# EAGLE board Robot (EAGLE 9.1.3)
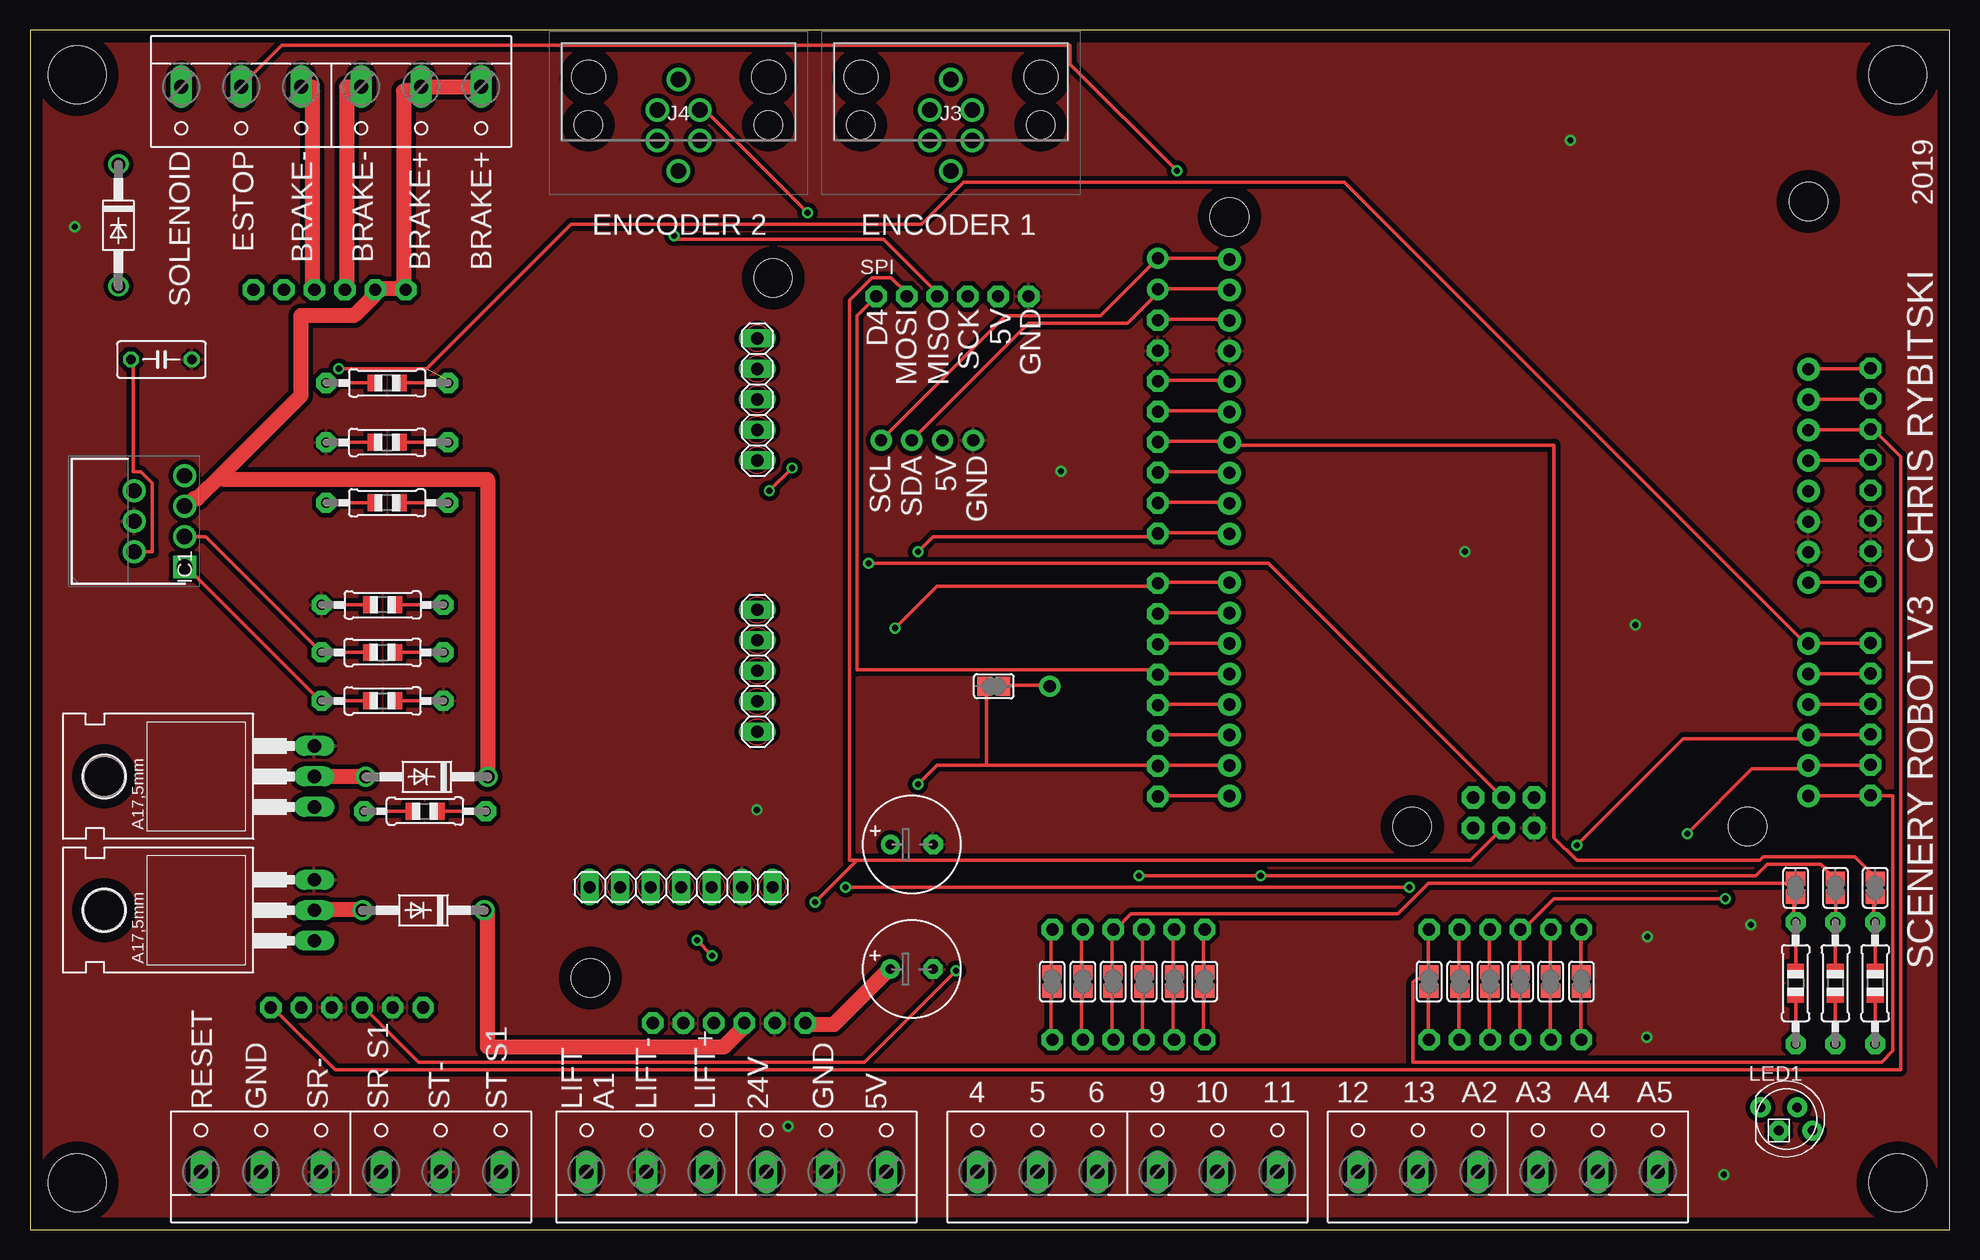
[diagram p0: board, top side]
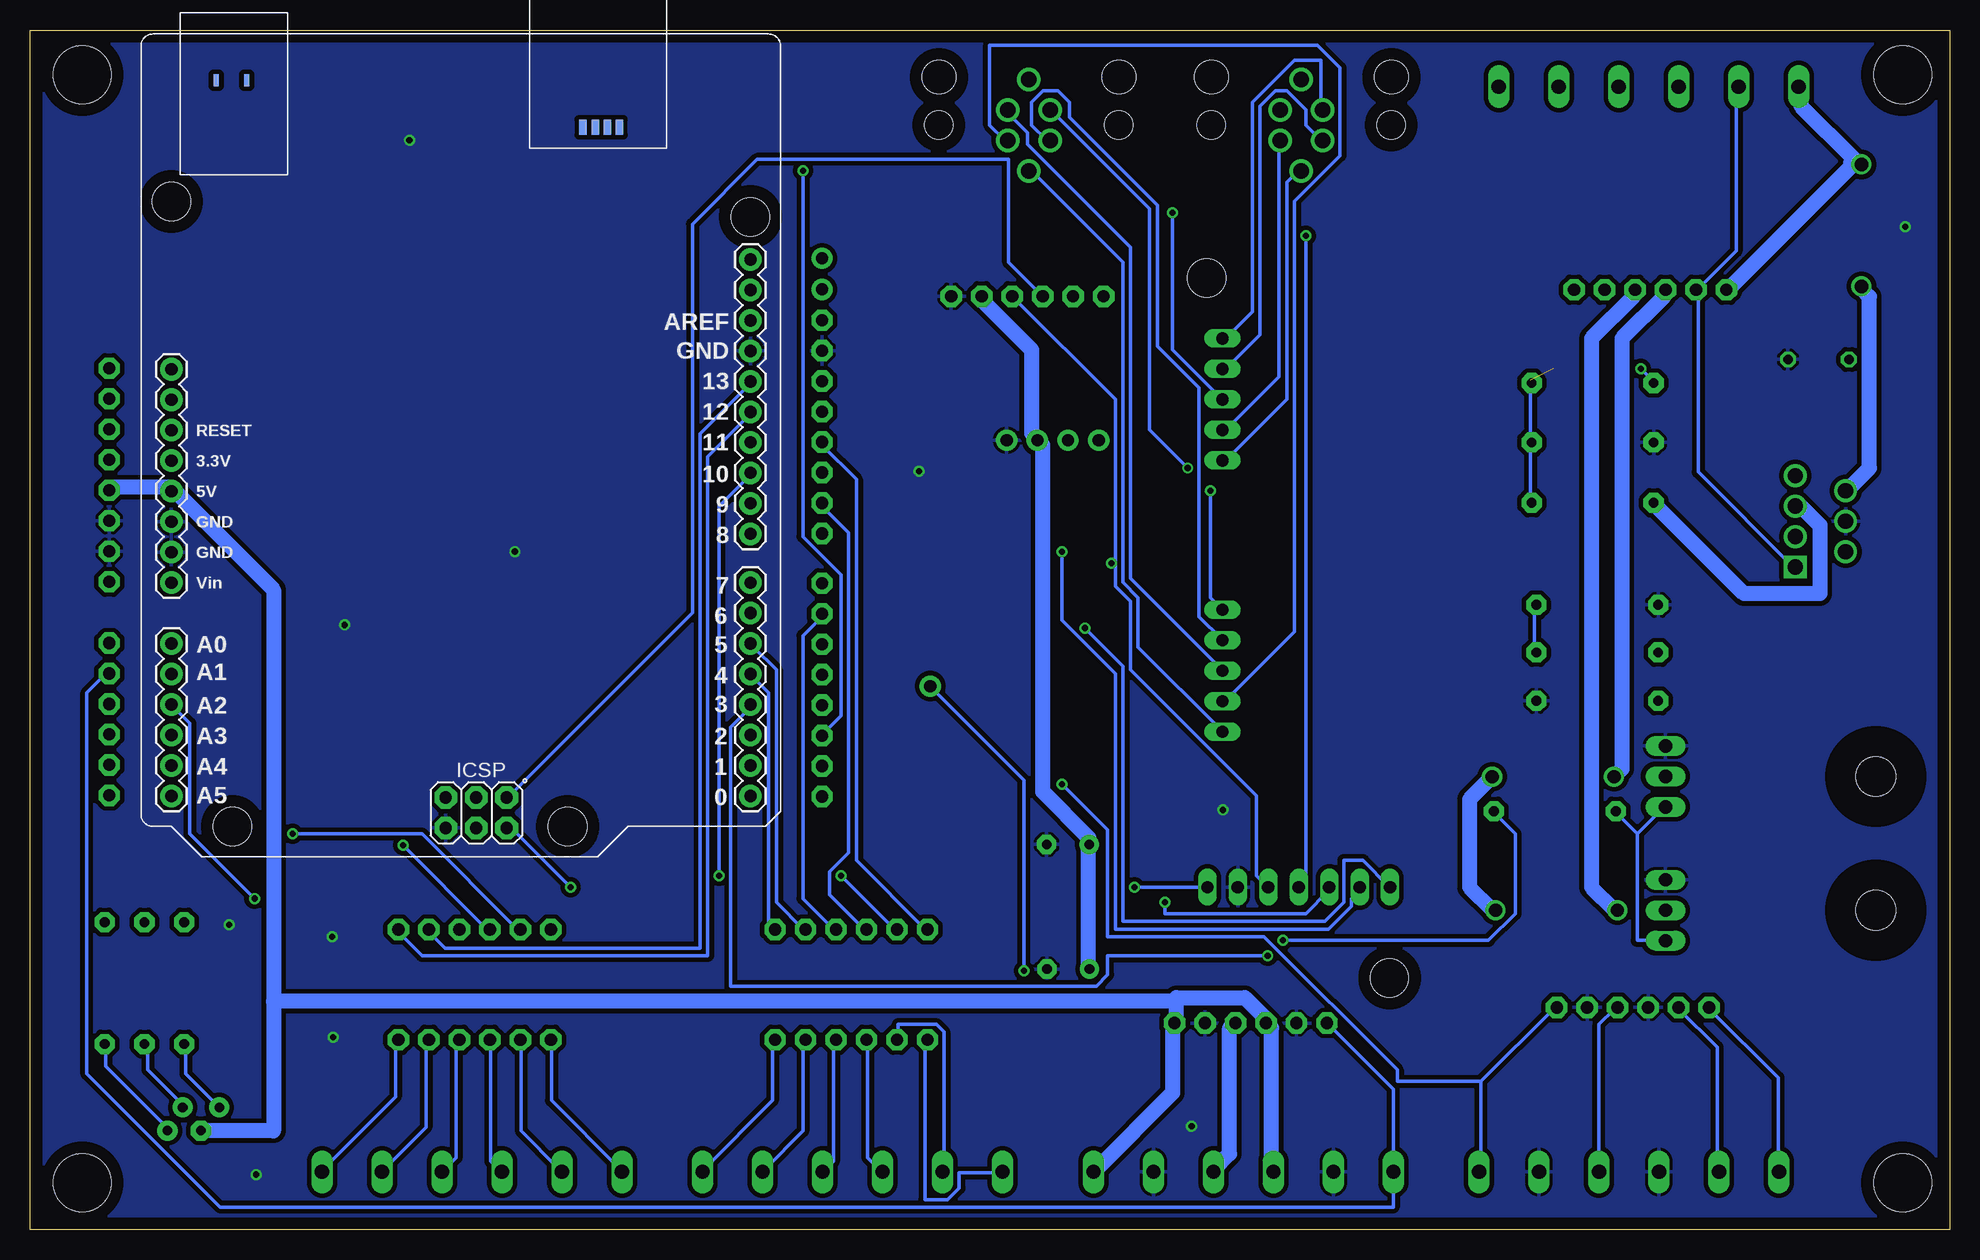
[diagram p1: board, bottom side, seen from below]

Size 160.03 x 99.97 mm. Coordinates in mm from the lower left corner, seen from the top.
Outline: 0,0 160,0 160.03,99.97 0.03,99.97 0,0
Copper layers (1*16): Top 0.035mm / dielectric 1.5mm / Bottom 0.035mm
Design rules "default": minimum track width 6mil, minimum drill 0.35mm, track to track 6mil, track to pad 6mil, pad to pad 6mil, via to via 6mil, smd to smd 6mil, copper to edge 40mil, drill to drill 6mil, minimum pad ring 10mil, minimum via ring 8mil, stop-mask expansion 4mil, vias tented up to drill 0mil, thermal gap 10mil
Net classes: 0 default: width 0.305 mm, drill 0.508 mm, clearance 0.254 mm; 1 Power: width 1.27 mm, drill 0.508 mm, clearance 0.381 mm
Holes 3.17 mm at 46.72,20.96 61.94,79.31
Holes 4.83 mm at 155.68,96.24 155.68,3.91 3.94,96.24 3.94,3.91

## Footprints (pad centres in the part's own frame; a part is rotated, then mirrored left to right if it is on the bottom)
E3,5-8 = drill 0.813 pad 1.6: + -1.778,0 | drill 0.813 pad 1.6 octagon: - 1.778,0
C050-030X075 = drill 0.813 octagon: 1 -2.54,0; 2 2.54,0
DO41-10 = drill 1.118: A 5.08,0; C -5.08,0
TO127P470X1016X2195-7P = drill 1.27 pad 1.905 square: 1 0,0 | drill 1.27 pad 1.905: 2 1.27,4.19; 3 2.54,0; 4 3.81,4.19; 5 5.08,0; 6 6.35,4.19; 7 7.62,0
421720812 = drill 1.3 pad 1.95: 1 -1.77,1.27; 2 -1.77,-1.27; 3 0,-3.81; 4 1.77,-1.27; 5 1.77,1.27; 6 0,3.81 | hole 2.35: -7.5,0; 7.5,0 | hole 2.8: -7.5,-4; 7.5,-4
1X05 = drill 1.016 long: 1 -5.08,0; 2 -2.54,0; 3 0,0; 4 2.54,0; 5 5.08,0
1X07 = drill 1.016 long: 1 -7.62,0; 2 -5.08,0; 3 -2.54,0; 4 0,0; 5 2.54,0; 6 5.08,0; 7 7.62,0
1X06-CLEANBIG = drill 1.016 pad 1.778 octagon: 1 -6.35,0; 2 -3.81,0; 3 -1.27,0; 4 1.27,0; 5 3.81,0; 6 6.35,0
1X08-CLEANBIG = drill 1.016 pad 1.778 octagon: 1 -8.89,0; 2 -6.35,0; 3 -3.81,0; 4 -1.27,0; 5 1.27,0; 6 3.81,0; 7 6.35,0; 8 8.89,0
1X01-CLEANBIG = drill 1.016 pad 1.778: 1 0,0
LED5MMRGB = drill 0.8 pad 1.676: 1 -2.159,0.968; 3 0.889,0.968; 4 2.159,-0.968 | drill 0.8 pad 1.676 octagon: 2 -0.635,-0.968
ARDUINO_UNO = drill 1.016 pad 1.88: 0 63.5,50.8; 1 60.96,50.8; 2 58.42,50.8; 3 55.88,50.8; 3.3V 35.56,2.54; 4 53.34,50.8; 5 50.8,50.8; 5V 38.1,2.54; 6 48.26,50.8; 7 45.72,50.8; 8 41.656,50.8; 9 39.116,50.8; 10 36.576,50.8; 11 34.036,50.8; 12 31.496,50.8; 13 28.956,50.8; A0 50.8,2.54; A1 53.34,2.54; A2 55.88,2.54; A3 58.42,2.54; A4 60.96,2.54; A5 63.5,2.54; AREF 23.876,50.8; GND 26.416,50.8; GND. 43.18,2.54; GND.. 40.64,2.54; I/OREF 30.48,2.54; N/C 27.94,2.54; RESET 33.02,2.54; SCL 18.796,50.8; SDA 21.336,50.8; VIN 45.72,2.54 | drill 1.016 pad 1.88 octagon: +5V 66.167,30.48; GND_ 66.167,25.4; MISO 63.627,30.48; MOSI 66.167,27.94; RESET. 63.627,25.4; SCK 63.627,27.94 | smd 1.016 x 0.508: <PWR>+V 3.861,8.814; <PWR>-V 3.861,6.274 | smd 1.27 x 0.635: <USB>+V 7.772,39.878; <USB>D+ 7.772,38.887; <USB>D- 7.772,37.871; <USB>GND 7.772,36.83 | hole 3.2: 66.04,7.62; 66.04,35.56; 15.24,50.8; 13.97,2.54
TO220AH = drill 1.118 long: B -2.54,-6.35; C 0,-6.35; E 2.54,-6.35 | hole 3.302: 0,11.176
0805-THM = drill 0.813 pad 1.676 octagon: 1 -5.08,0; 2 5.08,0
SJ = smd 1.168 x 1.6: 1 -0.762,0; 2 0.762,0
W237-6 = drill 1.194 long: 1 -12.5,-1.27; 2 -7.5,-1.27; 3 -2.5,-1.27; 4 2.5,-1.27; 5 7.5,-1.27; 6 12.5,-1.27

## Placement (x,y rotation side)
C5  [E3,5-8]  73.49,21.71 0 top
C6  0.1uF  [C050-030X075]  10.95,72.51 0 top
C7  [E3,5-8]  73.51,32.1 0 top
D1  1N4004  [DO41-10]  7.37,83.69 270 top
D2  1N4004  [DO41-10]  32.8,26.62 180 top
D3  1N4004  [DO41-10]  33.08,37.74 180 top
IC1  DRV102T  [TO127P470X1016X2195-7P]  12.88,55.22 90 top
J3  4-2172081-2  [421720812]  76.76,92.05 180 top
J4  4-2172081-2  [421720812]  54.06,92.05 180 top
JP1  [1X05]  60.63,46.58 90 top
JP2  [1X05]  60.63,69.18 90 top
JP3  [1X07]  54.28,28.54 0 top
JP4  [1X06-CLEANBIG]  24.97,78.33 0 top
JP5  [1X08-CLEANBIG]  94.01,44.98 270 top
JP6  [1X08-CLEANBIG]  153.42,62.89 90 top
JP7  [1X06-CLEANBIG]  58.27,17.22 180 top
JP8  [1X08-CLEANBIG]  94.01,66.9 270 top
JP9  [1X01-CLEANBIG]  94.01,78.35 0 top
JP10  [1X01-CLEANBIG]  94.01,80.95 0 top
JP11  [1X06-CLEANBIG]  153.42,42.54 90 top
JP12  [1X01-CLEANBIG]  84.99,45.28 0 top
JP13  [1X06-CLEANBIG]  26.42,18.51 180 top
JP14  [1X06-CLEANBIG]  91.57,15.82 180 top
JP15  [1X06-CLEANBIG]  122.97,15.82 180 top
JP16  [1X06-CLEANBIG]  91.57,25.01 0 top
JP17  [1X06-CLEANBIG]  122.97,25.01 0 top
JP18  [1X01-CLEANBIG]  70.95,65.78 0 top
JP19  [1X01-CLEANBIG]  73.5,65.78 0 top
JP20  [1X01-CLEANBIG]  76.06,65.78 0 top
JP21  [1X01-CLEANBIG]  78.62,65.78 0 top
LED1  RGBLED_CA-5MM  [LED5MMRGB]  146.41,9.22 0 top
PCB1  ARDUINO_UNO  [ARDUINO_UNO]  150.78,99.64 270 bottom
Q3  TIP120  [TO220AH]  17.35,37.77 90 top
Q4  TIP120  [TO220AH]  17.35,26.62 90 top
R5  [0805-THM]  153.8,20.54 270 top
R6  [0805-THM]  150.49,20.54 270 top
R7  [0805-THM]  147.17,20.54 270 top
R9  10K  [0805-THM]  29.77,70.56 180 top
R10  10K  [0805-THM]  29.77,60.57 180 top
R11  2.2K  [0805-THM]  29.77,65.6 0 top
R12  20K  [0805-THM]  29.39,48.1 0 top
R13  51K  [0805-THM]  29.39,52.07 180 top
R14  10K  [0805-THM]  29.39,44.06 0 top
R15  10K  [0805-THM]  32.92,34.87 0 top
SJ1  [SJ]  80.34,45.28 0 top
SJ2  [SJ]  97.92,20.67 270 top
SJ4  [SJ]  153.8,28.49 270 top
SJ5  [SJ]  150.49,28.49 270 top
SJ6  [SJ]  147.17,28.49 270 top
SJ7  [SJ]  95.41,20.67 270 top
SJ8  [SJ]  92.87,20.67 270 top
SJ9  [SJ]  90.28,20.67 270 top
SJ10  [SJ]  87.76,20.67 270 top
SJ11  [SJ]  85.2,20.67 270 top
SJ12  [SJ]  129.32,20.67 270 top
SJ13  [SJ]  126.75,20.67 270 top
SJ14  [SJ]  124.24,20.67 270 top
SJ15  [SJ]  121.7,20.67 270 top
SJ16  [SJ]  119.18,20.67 270 top
SJ17  [SJ]  116.62,20.67 270 top
SPI  [1X06-CLEANBIG]  76.89,77.77 0 top
X1  [W237-6]  25.1,93.98 180 top
X2  [W237-6]  26.75,6.09 0 top
X3  [W237-6]  58.88,6.09 0 top
X4  [W237-6]  91.47,6.09 0 top
X5  [W237-6]  123.19,6.09 0 top

## Library data of the parts
C5-C7 = rcl; SPICEPREFIX: C
D1-D3 = diode
IC1 = SamacSys_Parts; DESCRIPTION: PWM solenoid driver,DRV102T TO220-7 2.7A; HEIGHT: 4.7mm; MANUFACTURER_NAME: Texas Instruments; MANUFACTURER_PART_NUMBER: DRV102T; MOUSER_PART_NUMBER: 595-DRV102T; MOUSER_PRICE-STOCK: https://www.mouser.com/Search/Refine.aspx?Keyword=595-DRV102T; RS_PART_NUMBER: 1218532; RS_PRICE-STOCK: http://uk.rs-online.com/web/p/products/1218532
J3 J4 = 4-2172081-2; DESCRIPTION: TE Connectivity M12 Series, 5 Pole PCB Mount Circular Connector Plug, with Male Contacts, IP68; HEIGHT: 15mm; MANUFACTURER_NAME: TE Connectivity; MANUFACTURER_PART_NUMBER: 4-2172081-2; MOUSER_PART_NUMBER: 571-4-2172081-2; MOUSER_PRICE-STOCK: https://www.mouser.com/Search/Refine.aspx?Keyword=571-4-2172081-2; RS_PART_NUMBER: 9144538; RS_PRICE-STOCK: http://uk.rs-online.com/web/p/products/9144538
JP1-JP3 = pinhead
JP4-JP21 LED1 R5-R7 R9-R15 SPI = adafruit
PCB1 = E14_Arduino_revC
Q3 Q4 = transistor-power
SJ1 SJ2 SJ4-SJ17 = jumper
X1-X5 = con-wago-500; OC_FARNELL: unknown; OC_NEWARK: unknown

## Nets
3.3V: JP6.5 PCB1.3.3V
+5V [Power]: C5.+ C7.+ JP6.4 JP7.1 JP7.4 JP20.1 LED1.2 PCB1.5V SPI.5 X3.3 X3.6
+24V [Power]: D2.C D3.C IC1.5 JP4.5 JP4.6 JP7.3 R10.2 X1.1 X1.2 X3.4
A0: JP11.6 PCB1.A0 R9.1 R9.2 R10.1 R11.2
A1: JP7.6 JP11.5 PCB1.A1 X3.1
A2: JP11.4 JP17.4 PCB1.A2 SJ14.1
A3: JP11.3 JP17.3 PCB1.A3 SJ15.1
A4: JP11.2 JP17.2 PCB1.A4 SJ16.1
A5: JP11.1 JP17.1 PCB1.A5 SJ17.1
AREF: JP8.1 PCB1.AREF
ATN: JP6.8 PCB1.N/C
BRAKE1 [Power]: D3.A JP4.3 Q3.C X1.4
BRAKE2 [Power]: D2.A JP4.4 Q4.C X1.3
D0: JP5.8 PCB1.0
D1: JP5.7 JP13.1 PCB1.1 SJ1.1 X2.6
D3: JP5.5 PCB1.3 R15.2
D4: JP5.4 JP16.6 PCB1.4 SJ2.1 SPI.1
D5: JP5.3 JP16.5 PCB1.5 SJ7.1
D6: JP5.2 JP16.4 PCB1.6 SJ8.1
D7: JP3.1 JP5.1 PCB1.7
D8: JP3.2 JP8.8 PCB1.8
D9: JP8.7 JP16.3 PCB1.9 SJ6.1 SJ9.1
D10: JP8.6 JP16.2 PCB1.10 SJ5.1 SJ10.1
D11: JP8.5 JP16.1 PCB1.11 SJ4.1 SJ11.1
D12: JP8.4 JP17.6 PCB1.12 SJ12.1
D13: JP8.3 JP17.5 PCB1.13 SJ13.1
ESTOP-IN: IC1.1 JP4.2 JP5.6 PCB1.2 R14.1 X1.5
GND [Power]: C5.- C6.2 C7.- IC1.4 JP3.6 JP6.2 JP6.3 JP7.2 JP7.5 JP8.2 JP13.2 JP13.4 JP21.1 PCB1.GND PCB1.GND. PCB1.GND.. PCB1.GND_ Q3.E Q4.E R11.1 R13.2 R14.2 SPI.6 X2.3 X2.5 X3.2 X3.5
I/OREF: JP6.7 PCB1.I/OREF
MISO: JP3.4 PCB1.MISO SPI.3
MOSI: JP3.3 PCB1.MOSI SPI.2
N$2: LED1.1 R7.2
N$3: LED1.3 R6.2
N$4: LED1.4 R5.2
N$5: J3.1 JP1.2
N$6: J3.2 JP1.3
N$7: J3.5 JP1.4
N$8: J3.4 JP1.5
N$9: J4.1 JP2.2
N$10: J4.2 JP2.3
N$11: J4.4 JP2.5
N$12: J4.5 JP2.4
N$13: C6.1 IC1.2
N$14: R12.2 R13.1
N$15: IC1.3 R12.1
N$16 [Power]: D1.A IC1.6
N$17: Q3.B Q4.B R15.1
N$18: JP14.1 SJ2.2 X4.6
N$19: JP14.2 SJ7.2 X4.5
N$20: JP14.3 SJ8.2 X4.4
N$21: J3.6 JP1.1
N$22: JP12.1 JP13.3 SJ1.2 X2.4
N$23: J4.6 JP2.1
N$24: JP14.4 SJ9.2 X4.3
N$25: JP14.5 SJ10.2 X4.2
N$26: JP14.6 SJ11.2 X4.1
N$27: JP15.1 SJ12.2 X5.6
N$28: JP15.2 SJ13.2 X5.5
N$29: JP15.3 SJ14.2 X5.4
N$30: JP15.4 SJ15.2 X5.3
N$31: JP15.5 SJ16.2 X5.2
N$32: JP15.6 SJ17.2 X5.1
N$33: JP13.5 X2.2
N$34: R7.1 SJ6.2
N$35: R6.1 SJ5.2
N$36: R5.1 SJ4.2
RESET: JP6.6 JP13.6 PCB1.RESET X2.1
SCK: JP3.5 PCB1.SCK SPI.4
SCL: JP10.1 JP18.1 PCB1.SCL
SDA: JP9.1 JP19.1 PCB1.SDA
SOLENOID [Power]: D1.C JP4.1 X1.6
SPIV+: JP3.7 PCB1.+5V
VIN: JP6.1 PCB1.VIN

## Tracks (layer width: path | path; a pad name or v marks a point on that pad's centre or on a via)
3.3V
  Top 0.305: JP6.5 153.38,64.11 148.3,64.11 PCB1.3.3V
+5V
  Top 1.27: C5.+ 71.47,21.56 67.02,17.12 64.8,17.12 JP7.1
  Bottom 1.27: 139.73,19.02 139.73,53.31 147.98,61.57 PCB1.5V 148.62,61.88 153.38,61.88 JP6.4 | 139.73,19.02 139.73,8.23 145.76,8.23 LED1.2 | SPI.5 80.67,77.76 80.67,77.44 76.55,73.31 76.55,66.33 76.23,66.01 JP20.1 75.59,65.38 75.59,36.48 71.78,32.67 C7.+ 71.78,32.04 71.78,21.88 C5.+ | X3.3 56.54,5.05 56.54,16.8 56.86,17.12 JP7.4 57.18,17.75 58.77,19.34 64.48,19.34 | X3.6 71.15,5.05 64.8,11.4 64.8,17.12 JP7.1 64.48,17.75 64.48,19.34 | 139.73,19.02 139.41,19.02 64.8,19.02 64.48,19.34
+24V
  Top 1.27: D2.C 38.13,26.32 38.13,15.21 57.81,15.21 59.72,17.12 JP7.3 | X1.1 37.49,95.22 32.73,95.22 X1.2 32.1,94.9 31.14,94.9 31.14,79.03 JP4.6 31.14,78.39 28.92,78.39 JP4.5 28.6,77.76 27.02,76.17 22.57,76.17 22.57,69.5 15.9,62.84 | 15.9,62.84 14,60.93 13.68,60.93 13.05,60.3 IC1.5 | D3.C 38.13,37.75 38.13,62.52 16.22,62.52 15.9,62.84
  Bottom 1.27: D2.C 38.13,26.64 40.03,28.55 40.03,35.85 38.45,37.44 D3.C | JP7.3 59.72,17.12 60.04,16.8 60.04,6.32 61.31,5.05 X3.4 | R10.2 24.48,60.3 17.17,52.99 10.82,52.99 10.82,58.71 12.41,60.3 12.73,60.3 IC1.5
A0  (via drill 0.51)  (1 unrouted)
  Top 0.305: JP11.6 153.38,48.87 148.3,48.87 PCB1.A0 147.98,48.87 109.57,87.28 77.82,87.28 74.32,83.79 45.11,83.79 33.05,71.73 v25.75,71.73 | 34.95,70.77 R9.1
  Bottom 0.305: R10.1 34.95,60.61 34.95,65.38 R11.2 34.95,65.69 34.95,70.46 R9.1 | v25.75,71.73 24.79,70.77 R9.2
A1
  Top 0.305: JP11.5 153.38,46.33 148.3,46.33 PCB1.A1
  Bottom 0.305: JP7.6 51.78,17.12 46.38,11.72 46.38,5.05 X3.1 46.38,4.73 46.38,1.88 144.17,1.88 155.29,12.99 155.29,44.74 153.7,46.33 JP11.5
A2  (via drill 0.51)
  Top 0.305: SJ14.1 124.17,21.56 124.17,24.74 JP17.4 124.49,25.05 127.03,27.59 v141.32,27.59 | JP11.4 153.38,43.79 148.3,43.79 PCB1.A2
  Bottom 0.305: v141.32,27.59 146.71,32.99 146.71,42.2 147.98,43.47 PCB1.A2
A3  (via drill 0.51)
  Top 0.305: SJ15.1 121.63,21.56 121.63,24.74 JP17.3 | JP11.3 153.38,41.25 148.3,41.25 PCB1.A3 147.98,40.93 137.82,40.93 v128.93,32.04
  Bottom 0.305: v128.93,32.04 121.95,25.05 JP17.3
A4  (via drill 0.51)
  Top 0.305: SJ16.1 119.09,21.56 119.09,24.74 JP17.2 | JP11.2 153.38,38.71 148.3,38.71 PCB1.A4 147.98,38.39 143.54,38.39 v138.14,32.99
  Bottom 0.305: v138.14,32.99 127.35,32.99 119.41,25.05 JP17.2
A5
  Top 0.305: JP17.1 116.55,24.74 116.55,21.56 SJ17.1 116.55,21.24 116.23,20.93 115.6,20.93 115.28,20.61 115.28,13.94 154.33,13.94 155.29,14.89 155.29,36.17 153.7,36.17 JP11.1 153.38,36.17 148.3,36.17 PCB1.A5
AREF
  Top 0.305: JP8.1 94.01,75.85 99.72,75.85 PCB1.AREF
ATN
  Top 0.305: JP6.8 153.38,71.73 148.3,71.73 PCB1.N/C
BRAKE1
  Top 1.27: Q3.C 23.84,37.75 27.97,37.75 D3.A | JP4.3 23.52,78.39 23.52,95.22 22.89,95.22 X1.4
  Bottom 1.27: D3.A 27.97,37.75 27.33,38.39 27.33,74.27 23.84,77.76 23.84,78.08 JP4.3
BRAKE2
  Top 1.27: Q4.C 23.84,26.64 27.65,26.64 D2.A | JP4.4 26.38,78.39 26.38,95.22 27.33,95.22 X1.3
  Bottom 1.27: D2.A 27.97,26.64 29.87,28.55 29.87,74.27 26.38,77.76 26.38,78.08 JP4.4
D0
  Top 0.305: JP5.8 94.01,36.17 99.72,36.17 PCB1.0
D1  (via drill 0.51)
  Top 0.305: 79.72,38.71 79.72,45.06 SJ1.1 | 94.01,38.71 79.72,38.71 | 94.01,38.71 JP5.7 94.01,38.71 | 94.01,38.71 99.72,38.71 PCB1.1 | v74.01,37.12 75.59,38.71 79.72,38.71
  Bottom 0.305: 39.08,12.35 33.05,18.39 JP13.1 | 39.08,12.35 39.08,5.05 X2.6 | 39.08,12.35 46.07,12.35 46.07,13.31 57.18,24.42 70.2,24.42 70.2,33.31 v74.01,37.12
D3  (via drill 0.51)
  Top 0.305: v56.86,22.83 v55.59,24.1 | JP5.5 94.01,43.79 99.72,43.79 PCB1.3
  Bottom 0.305: v55.59,24.1 38.45,24.1 36.22,26.32 36.22,32.99 37.81,34.58 R15.2 | v56.86,22.83 70.2,22.83 70.2,21.24 71.15,20.29 101.63,20.29 101.63,41.88 100.04,43.47 PCB1.3
D4
  Top 0.305: SJ2.1 97.82,21.56 97.82,24.74 JP16.6 | 94.01,46.33 93.69,46.64 68.93,46.64 68.93,76.17 70.51,77.76 SPI.1 | 94.01,46.33 JP5.4 94.01,46.33 | 94.01,46.33 99.72,46.33 PCB1.4
  Bottom 0.305: JP16.6 98.14,25.05 98.45,25.37 98.45,44.74 99.72,46.01 PCB1.4
D5
  Top 0.305: SJ7.1 95.28,21.56 95.28,24.74 JP16.5 | JP5.3 94.01,48.87 99.72,48.87 PCB1.5
  Bottom 0.305: JP16.5 95.6,25.05 97.82,27.28 97.82,46.64 99.72,48.55 PCB1.5
D6
  Top 0.305: SJ8.1 92.74,21.56 92.74,24.74 JP16.4 | JP5.2 94.01,51.41 99.72,51.41 PCB1.6
  Bottom 0.305: JP16.4 93.06,25.05 95.6,27.59 95.6,49.5 94.01,51.09 JP5.2
D7  (via drill 0.51)
  Top 0.305: v72.1,50.14 75.59,53.63 94.01,53.63 JP5.1 94.01,53.95 99.72,53.95 PCB1.7
  Bottom 0.305: v72.1,50.14 68.93,46.96 68.93,25.69 52.1,25.69 50.51,27.28 50.51,30.77 48.92,30.77 46.7,28.55 JP3.1
D8  (via drill 0.51)
  Top 0.305: v74.01,56.49 75.28,57.76 94.01,57.76 JP8.8 94.01,58.07 99.72,58.07 PCB1.8
  Bottom 0.305: v74.01,56.49 74.01,50.77 69.56,46.33 69.56,25.05 51.78,25.05 49.88,26.96 49.88,27.59 49.24,28.23 JP3.2
D9
  Top 0.305: JP8.7 94.01,60.61 99.72,60.61 PCB1.9 | SJ9.1 90.2,21.56 90.2,24.74 JP16.3 90.52,25.05 91.79,26.32 114.01,26.32 116.55,28.86 146.71,28.86 147.03,29.18 SJ6.1
  Bottom 0.305: JP8.7 94.01,60.3 91.79,58.07 91.79,31.4 93.37,29.82 93.37,27.91 90.52,25.05 JP16.3
D10  (via drill 0.51)
  Top 0.305: JP8.6 94.01,63.15 99.72,63.15 PCB1.10 | SJ10.1 87.66,21.56 87.66,24.74 JP16.2 | v92.42,29.5 v102.58,29.5 143.86,29.5 144.81,30.45 149.25,30.45 150.21,29.5 SJ5.1
  Bottom 0.305: v92.42,29.5 87.98,25.05 JP16.2 | v102.58,29.5 102.58,60.3 100.04,62.84 PCB1.10
D11
  Top 0.305: SJ11.1 85.12,21.56 85.12,24.74 JP16.1 | SJ4.1 153.7,29.5 152.11,31.09 144.49,31.09 144.17,30.77 128.93,30.77 127.03,32.67 127.03,65.38 100.04,65.38 PCB1.11 99.72,65.69 94.01,65.69 JP8.5
  Bottom 0.305: JP16.1 85.44,25.05 91.15,30.77 91.15,62.52 94.01,65.38 JP8.5
D12
  Top 0.305: SJ12.1 129.25,21.56 129.25,24.74 JP17.6 | JP8.4 94.01,68.23 99.72,68.23 PCB1.12
  Bottom 0.305: JP17.6 129.25,24.74 127.35,22.83 103.53,22.83 103.53,64.42 100.04,67.92 PCB1.12
D13
  Top 0.305: SJ13.1 126.71,21.56 126.71,24.74 JP17.5 | JP8.3 94.01,70.77 99.72,70.77 PCB1.13
  Bottom 0.305: JP17.5 126.71,24.74 125.44,23.47 104.17,23.47 104.17,66.33 100.04,70.46 PCB1.13
ESTOP-IN  (via drill 0.51)
  Top 0.305: R14.1 24.16,44.1 13.05,55.22 IC1.1 | JP5.6 94.01,41.25 99.72,41.25 PCB1.2 | v95.6,88.24 86.71,97.13 86.71,98.71 20.98,98.71 17.81,95.54 X1.5
  Bottom 0.305: X1.5 17.81,95.22 17.81,81.57 20.98,78.39 JP4.2 20.98,78.08 20.98,63.15 13.05,55.22 IC1.1 | v95.6,88.24 95.6,57.76 92.42,54.58 92.42,42.83 94.01,41.25 JP5.6
GND  (via drill 0.51)
  other vias: 60.58,34.97 63.2,8.61 85.93,63.19 128.4,90.78 119.61,56.51 133.81,50.39 134.83,24.41 143.44,25.42 134.75,16.05 141.18,4.59 3.71,83.56
  pour Top: -2.03,101.85 -1.21,-4.17 163.78,-2.93 163.78,103.91 0.44,103.09
  pour Bottom: -3.65,102.26 -3.65,-1.2 2.54,-7.4 158.93,-7.4 164.62,-1.71 164.62,100.76 159.77,105.61 -0.63,105.61 -3.32,102.92
I/OREF
  Top 0.305: JP6.7 153.38,69.19 148.3,69.19 PCB1.I/OREF
MISO  (via drill 0.51)
  Top 0.305: v53.69,82.84 54,82.52 71.15,82.52 75.59,78.08 SPI.3
  Bottom 0.305: v53.69,82.84 53.69,28.86 54,28.55 JP3.4 | PCB1.MISO 120.04,36.17 104.8,51.41 104.8,83.79 99.41,89.19 78.45,89.19 78.45,80.62 75.91,78.08 SPI.3
MOSI  (via drill 0.51)
  Top 0.305: 68.93,30.77 v65.43,27.28 | 68.93,30.77 120.04,30.77 122.58,33.31 PCB1.MOSI | 68.93,30.77 68.29,30.77 68.29,77.44 70.2,79.35 71.78,79.35 73.05,78.08 SPI.2
  Bottom 0.305: v65.43,27.28 65.43,26.32 53.69,26.32 51.78,28.23 JP3.3
N$2
  Bottom 0.305: LED1.1 144.49,10.45 147.03,12.99 147.03,15.21 R7.2
N$3
  Bottom 0.305: LED1.3 147.35,10.45 150.21,13.31 150.21,15.21 R6.2
N$4
  Bottom 0.305: LED1.4 148.62,8.54 153.7,13.62 153.7,15.21 R5.2
N$5
  Bottom 0.305: JP1.2 60.35,44.1 54.64,49.82 54.64,85.7 50.83,89.51 50.83,96.81 52.73,98.71 80.04,98.71 80.04,92.05 78.77,90.78 J3.1
N$6
  Bottom 0.305: JP1.3 60.67,46.64 68.29,54.26 68.29,81.89 76.86,90.46 76.86,91.41 78.45,93 78.45,93.32 J3.2
N$7
  Bottom 0.305: JP1.4 60.67,49.18 62.58,51.09 62.58,70.14 66.07,73.63 66.07,85.38 73.37,92.68 73.37,93.95 74.32,94.9 75.59,94.9 76.55,93.95 76.55,92.05 75.28,90.78 J3.5
N$8  (via drill 0.51)
  Top 0.305: v63.53,63.47 v61.62,61.57
  Bottom 0.305: v61.62,61.57 61.62,52.68 60.67,51.72 JP1.5 | v63.53,63.47 66.7,66.65 66.7,85.06 74.96,93.32 J3.4
N$9
  Bottom 0.305: JP2.2 60.35,66.65 55.91,71.09 55.91,90.78 J4.1
N$10  (via drill 0.51)
  Top 0.305: v64.8,84.74 56.23,93.32 55.91,93.32 J4.2
  Bottom 0.305: v64.8,84.74 64.8,73.31 60.67,69.19 JP2.3
N$11
  Bottom 0.305: JP2.5 60.35,74.27 58.13,76.49 58.13,93.95 54.64,97.44 52.42,97.44 52.42,93.32 J4.4
N$12
  Bottom 0.305: JP2.4 60.35,71.73 57.5,74.58 57.5,93.63 56.23,94.9 55.27,94.9 53.69,93.32 53.69,92.05 52.42,90.78 J4.5
N$13
  Top 0.305: C6.1 8.6,72.36 8.6,63.15 9.24,63.15 10.19,62.2 10.19,56.49 8.92,56.49 IC1.2
N$14
  Bottom 0.305: R12.2 34.64,48.23 34.64,52.04 R13.1
N$15
  Top 0.305: R12.1 24.16,48.23 14.63,57.76 13.05,57.76 IC1.3
N$16
  Bottom 1.27: D1.A 7.33,78.39 6.7,77.76 6.7,63.47 8.6,61.57 IC1.6
N$17
  Bottom 0.305: 26.06,32.99 26.06,24.1 23.84,24.1 Q4.B | 26.06,32.99 27.65,34.58 R15.1 | 26.06,32.99 23.84,35.21 Q3.B
N$18
  Top 0.305: SJ2.2 97.82,19.66 97.82,15.85 JP14.1
  Bottom 0.305: X4.6 103.85,5.05 98.14,10.77 98.14,15.53 JP14.1
N$19
  Top 0.305: SJ7.2 95.28,19.66 95.28,15.85 JP14.2
  Bottom 0.305: X4.5 98.77,5.05 95.6,8.23 95.6,15.53 JP14.2
N$20
  Top 0.305: SJ8.2 92.74,19.66 92.74,15.85 JP14.3
  Bottom 0.305: X4.4 93.69,5.05 93.06,5.69 93.06,15.53 JP14.3
N$21
  Bottom 0.305: JP1.1 60.67,41.56 67.66,48.55 67.66,52.68 68.93,53.95 68.93,80.62 76.55,88.24 J3.6
N$22  (via drill 0.51)
  Top 0.305: SJ1.2 81.31,45.37 84.8,45.37 JP12.1 | v77.18,21.56 69.56,13.94 32.41,13.94 27.97,18.39 JP13.3
  Bottom 0.305: JP13.3 27.97,18.39 29.24,17.12 29.24,5.05 X2.4 | v77.18,21.56 77.18,37.44 84.8,45.06 JP12.1
N$23
  Bottom 0.305: JP2.1 60.35,64.11 55.27,69.19 55.27,87.28 54.32,88.24 J4.6
N$24
  Top 0.305: SJ9.2 90.2,19.66 90.2,15.85 JP14.4
  Bottom 0.305: X4.3 89.25,5.05 90.2,6 90.2,15.53 JP14.4
N$25
  Top 0.305: SJ10.2 87.66,19.66 87.66,15.85 JP14.5
  Bottom 0.305: X4.2 83.85,5.05 83.85,16.48 84.48,17.12 87.66,17.12 87.66,15.85 JP14.5
N$26
  Top 0.305: SJ11.2 85.12,19.66 85.12,15.85 JP14.6
  Bottom 0.305: X4.1 79.09,4.73 82.58,4.73 82.58,3.46 83.53,2.51 85.44,2.51 85.44,15.53 JP14.6
N$27
  Top 0.305: SJ12.2 129.25,19.66 129.25,15.85 JP15.1
  Bottom 0.305: X5.6 135.6,5.05 129.57,11.08 129.57,15.53 JP15.1
N$28
  Top 0.305: SJ13.2 126.71,19.66 126.71,15.85 JP15.2
  Bottom 0.305: X5.5 130.52,5.05 127.03,8.54 127.03,15.53 JP15.2
N$29
  Top 0.305: SJ14.2 124.17,19.66 124.17,15.85 JP15.3
  Bottom 0.305: X5.4 125.44,5.05 124.49,6 124.49,15.53 JP15.3
N$30
  Top 0.305: SJ15.2 121.63,19.66 121.63,15.85 JP15.4
  Bottom 0.305: X5.3 121,5.05 121.63,5.69 121.63,15.53 JP15.4
N$31
  Top 0.305: SJ16.2 119.09,19.66 119.09,15.85 JP15.5
  Bottom 0.305: X5.2 115.92,5.05 119.09,8.23 119.09,15.53 JP15.5
N$32
  Top 0.305: SJ17.2 116.55,19.66 116.55,15.85 JP15.6
  Bottom 0.305: X5.1 110.84,5.05 116.55,10.77 116.55,15.53 JP15.6
N$33
  Bottom 0.305: JP13.5 22.57,18.39 19.4,15.21 19.4,5.05 X2.2
N$34
  Top 0.305: SJ6.2 147.03,27.59 147.03,25.69 R7.1
N$35
  Top 0.305: SJ5.2 150.52,27.59 150.52,25.69 R6.1
N$36
  Top 0.305: SJ4.2 153.7,27.59 153.7,25.69 R5.1
RESET
  Top 0.305: PCB1.RESET 148.3,66.65 153.38,66.65 JP6.6 153.7,66.65 155.92,64.42 155.92,13.31 25.43,13.31 20.35,18.39 JP13.6
  Bottom 0.305: JP13.6 20.03,18.39 14.32,12.67 14.32,5.05 X2.1
SCK  (via drill 0.51)
  Top 0.305: v69.88,55.53 103.22,55.53 122.58,36.17 PCB1.SCK
  Bottom 0.305: 69.56,55.53 69.56,69.19 78.13,77.76 SPI.4 | 69.56,55.53 69.56,53.63 68.29,52.36 68.29,46.64 57.81,36.17 57.81,29.5 56.86,28.55 JP3.5 | 69.56,55.53 v69.88,55.53
SCL
  Top 0.305: 94.01,80.93 89.25,76.17 81.31,76.17 71.15,66.01 JP18.1 | 94.01,80.93 JP10.1 94.01,80.93 | 94.01,80.93 99.72,80.93 PCB1.SCL
SDA
  Top 0.305: JP19.1 73.69,66.01 83.21,75.54 91.47,75.54 94.01,78.08 JP9.1 94.01,78.39 99.72,78.39 PCB1.SDA
SOLENOID
  Bottom 1.27: 7.97,89.19 12.41,93.63 12.41,95.22 X1.6 | 7.97,89.19 7.65,88.87 D1.C | JP4.1 18.44,78.39 8.28,88.55 8.28,88.87 7.97,89.19
SPIV+  (via drill 0.51)
  Top 0.305: v114.96,28.55 v67.97,28.55
  Bottom 0.305: v67.97,28.55 61.94,28.55 JP3.7 | v114.96,28.55 120.04,33.63 PCB1.+5V
VIN
  Top 0.305: JP6.1 153.38,53.95 148.3,53.95 PCB1.VIN
(copper drawn outside any net)
  shapes: Top circle x17

## Text on the board
tPlace: 2019 | ENCODER 2 | ENCODER 1 | ESTOP | BRAKE- | BRAKE- | BRAKE+ | SOLENOID | D4 | 5V | SCK | GND | MOSI | MISO | 5V | SCL | SDA | GND | SCENERY ROBOT V3 CHRIS RYBITSKI | 4 | 5 | 6 | 9 | 10 | 11 | 12 | 13 | A2 | A3 | A4 | A5 | RESET | GND | SR- | SR S1 | ST- | ST S1 | LIFT / A1 | LIFT- | LIFT+ | 24V | GND | 5V
tNames: BRAKE+
LPC17xx: ARDUINO YUN REV2 | SYREN DATA | LS7366R ENCODER BUFFER | D9 R / D10 G / D11 B